# Altium PCB SiPM_ASSY.PCBDOC
Units mm, origin at the board's own origin, x right, y up, seen from the top; angles counter-clockwise.
Board outline 17.25 x 19.75 mm, 2 copper layers (TOP, BOT), stack 1.57 mm thick; 6 components, 5 nets, 25 pads, 10 vias.
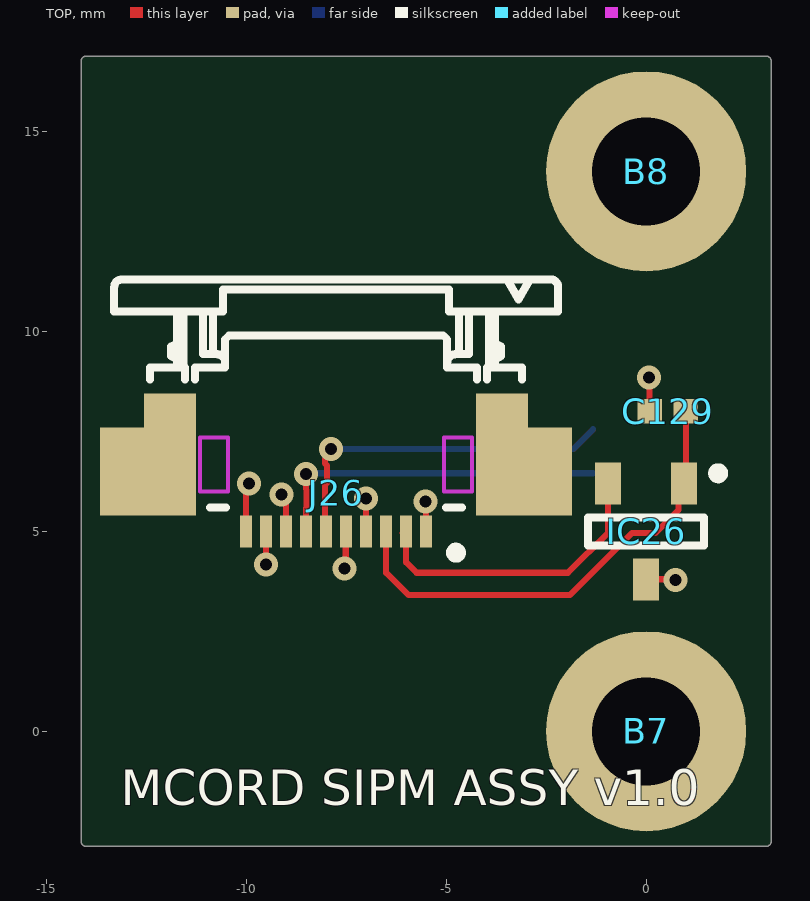
[diagram p0: TOP view]
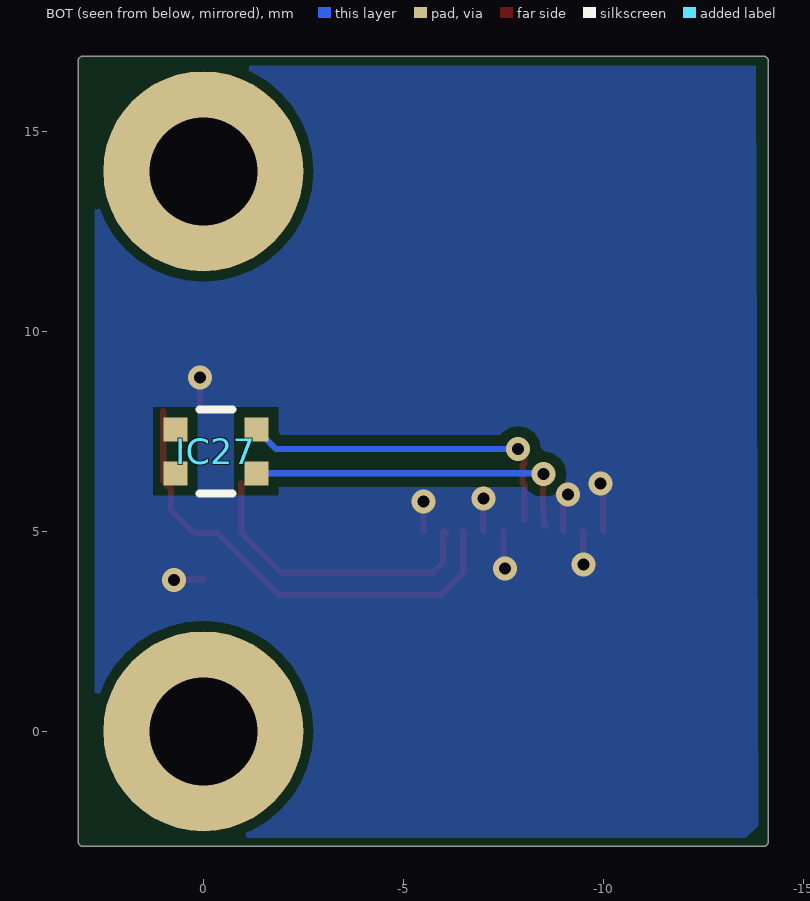
[diagram p1: BOT view, seen from below]
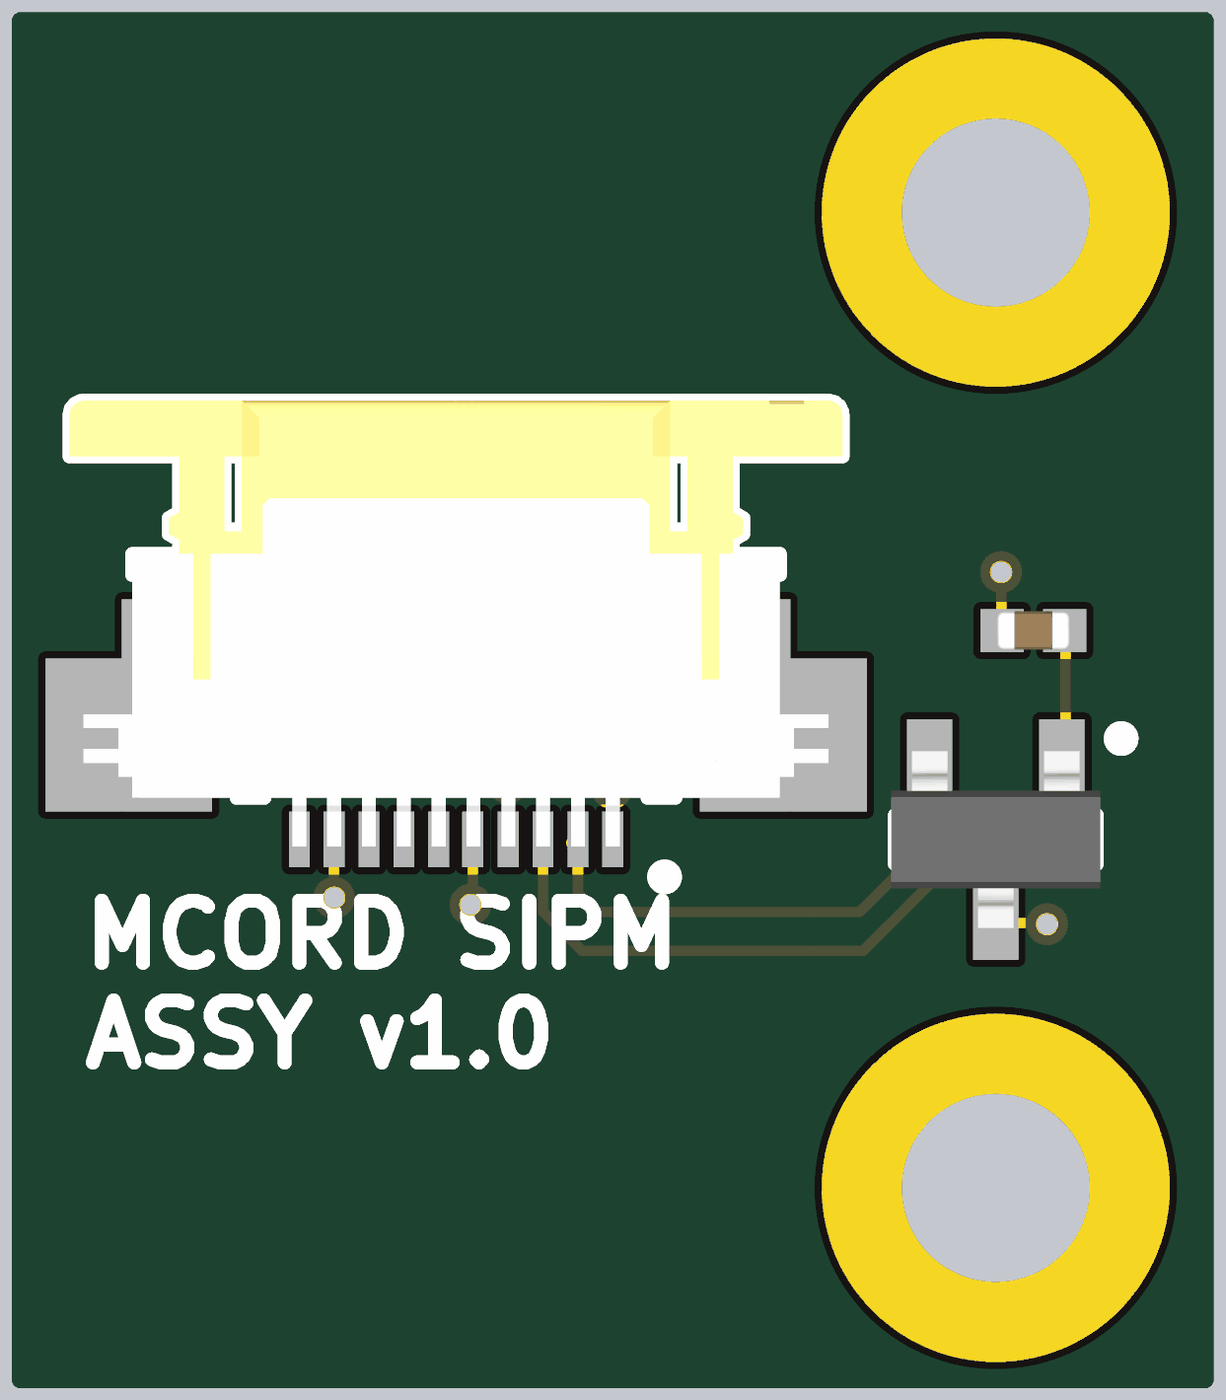
[diagram p2: 3D render of the assembled board from above, using the file's embedded part models]

## Layer stack, top to bottom
TopSolder: solder mask 0.01, Solder Resist, Dk 3.5
TOP: signal copper 0.035
Dielectric2: core 1.5, Core-042, Dk 4.6
BOT: signal copper 0.035
BottomSolder: solder mask 0.01, Solder Resist, Dk 3.5

## Board outline
-14,-2.877 cw(c-14,-2.75) -14.127,-2.75 -14.127,16.75 cw(c-14,16.75) -14,16.877 3,16.877 cw(c3,16.75) 3.127,16.75 3.127,-2.75 cw(c3,-2.75) 3,-2.877

## Design rules (kind name [scope] priority, off if disabled: settings)
AcuteAngle [All] p1: minimum=6.00000000000000E+0001 checktracksonly=FALSE
Clearance keepout [All vs OnLayer('KeepOutLayer')] p1: gap=0.1 ignorepadtopadclearanceinfootprint=FALSE
Clearance [All] p2: gap=0.152 ignorepadtopadclearanceinfootprint=FALSE except(0.254: Arc-Poly Track-Poly SMDPad-Poly THPad-Poly Via-Poly Fill-Poly Poly-Poly)
DiffPairsRouting [All] p1: maxlimit=0.508 minlimit=0.381 mostfreqgap=0.432 toplayer_minwidth=0.381 toplayer_maxwidth=0.381 toplayer_prefwidth=0.381 bottomlayer_minwidth=0.381 bottomlayer_maxwidth=0.381 bottomlayer_prefwidth=0.381 maxuncoupledlength=12.7
HoleSize [All] p1: absolutevalues=TRUE maxlimit=5.08 minlimit=0.025 maxpercent=80.000 minpercent=20.000
MinimumSolderMaskSliver [All] p1: minsoldermaskwidth=0
MinimumSolderMaskSliver SilkscreenOverComponentPads [All] p2: minsoldermaskwidth=0
PlaneClearance [All] p1: clearance=0.203
PlaneConnect PlaneConnect_pad [(InPadClass('All Pads'))] p1: planeconnectstyle=Relief reliefexpansion=0.508 reliefentries=4 reliefconductorwidth=0.254 reliefairgap=0.254
PlaneConnect [All] p2: planeconnectstyle=Direct reliefexpansion=0.508 reliefentries=4 reliefconductorwidth=0.254 reliefairgap=0.254
PolygonConnect PolygonConnect_pad [(InPadClass('All Pads'))] p1: connectstyle=Relief reliefconductorwidth=0.254 reliefentries=4 polygonreliefangle="90 Angle" airgapwidth=0.254
PolygonConnect [All] p2: connectstyle=Direct reliefconductorwidth=0.254 reliefentries=4 polygonreliefangle="90 Angle" airgapwidth=0.254
RoomDefinition SiPM_ASSY [InComponentClass('SiPM_ASSY')] p1: confinementstyle=ConfineIn formatcopy=TRUE lockcomponents=FALSE outline -9,3 -10,3 -10,-2 -9,-2
RoutingVias [All] p1: holewidth=0.2 width=0.5 viastyle="Through Hole" minholewidth=0.2 minwidth=0.5 maxholewidth=0.5 maxwidth=1
SilkToSilkClearance [All] p1: silktosilkclearance=0
SilkToSolderMaskClearance [IsPad] p1: minsilkscreentomaskgap=0 clearancetoexposedcopper=TRUE
SolderMaskExpansion [All] p1: expansion=0.102
ViasUnderSMD ViasUnderSMD_allow [InComponent('IC18') or InComponent('IC10') or InComponent('IC13') or InComponent('IC14') or InComponent('IC15')] p1: allowed=TRUE
ViasUnderSMD [All] p2: allowed=FALSE
Width Width_1 [(InDifferentialPairClass('All Differential Pairs'))] p1: maxlimit=0.203 minlimit=0.203 preferedwidth=0.203
Width [All] p2: maxlimit=2.54 minlimit=0.152 preferedwidth=0.152
23 further rules are at their usual default settings.

## Components (designator, comment, footprint, x,y, rotation, side; value= is the part's Value field where it differs from the comment)
B7 "Plated Hole" MTG270_500 0,0 r0 top
B8 "Plated Hole" MTG270_500 0,14 r0 top
C129 "100nF" CAPC1005X55N 0.54,8 r0 top
IC26 "LM45CIM3" SOT95P251X112-3N 0,5 r270 top
IC27 "S13360-1325PE" HAMAMATSU_S13360-1325PE -0.313,7 r90 bottom (schematic designator IC?)
J26 "FFC/FPC" MOLEX_52745-1097 -7.75,5 r180 top

## Footprints (in the part's own frame and the unit in brackets; to place one, negate y for a bottom-side part, rotate by r counter-clockwise, add the part's x,y. Pads: shape width x height; smd on the part's side, far side on the other; paste and mask are expansions set on the pad)
CAPC1005X55N [mm] "Capacitor, Non-Polarized, Chip; 1.00mm L X 0.50mm W X 0.70mm H, IPC Medium Density"
  rect 0.62x0.62 smd: 1(-0.45,0) 2(0.45,0)
  body extent -0.52,-0.27 0.53,0.28, height 0.55
HAMAMATSU_S13360-1325PE [mm] "1.3 x 1.3mm2, 50µm Microcell Type, SMD MPPC (Multi-Pixel Photon Counter, Body 2.1mm x mm X 2.625mm"
  rect 0.6x0.6 smd: 1(-0.55,1.012) 2(-0.55,-1.012) 3(0.55,-1.012) 4(0.55,1.012)
  silkscreen extent -1.05,-0.41 1.05,0.41, body extent -1.05,-1.31 1.05,1.31, height 1
MOLEX_52745-1097 [mm] "10 Contacts, 0.5mm Pitch, Right Angled Surface Mount FPC Connector, ZIF, Top Contact Style"
  rect 0.3x0.8 smd: 1(-2.25,0) 2(-1.75,0) 3(-1.25,0) 4(-0.75,0) 5(-0.24,0) 6(0.25,0) 7(0.75,0) 8(1.25,0) 9(1.75,0) 10(2.25,0)
  rect 1.1x2.2 smd: MECH(-5.35,-1.5) MECH(5.35,-1.5)
  rect 1.3x3.05 smd: MECH(-4.15,-1.925) MECH(4.15,-1.925)
  TOP keep-out lines w0.1: 3.4,-1 2.7,-1 2.7,-2.34 3.4,-2.34 3.4,-1 ; -2.7,-1 -2.7,-2.34 -3.4,-2.34 -3.4,-1 -2.7,-1
  silkscreen extent -5.55,-6.3 5.55,0.66, body extent -5.55,-6.3 5.55,0.1, height 2
MTG270_500 [mm] "Plated Through Hole: Hole Dia.=2.7mm Pad Dia.=5.0mm"
  round 5 hole 2.7: 1(0,0)
SOT95P251X112-3N [mm] "SOT23 3-Leads, Pitch 0.95mm - Body 1.3x2.9mm, IPC Medium Density"
  rect 1.05x0.65 smd: 1(-1.2,0.95) 2(-1.2,-0.95) 3(1.2,0)
  silkscreen extent -1.57,-1.45 0.35,1.92, body extent -1.27,-1.5 1.27,1.5, height 1.12

## Part data
B7 B8: library part PLATED_HOLE2.7_PAD5.0, "Single Terminal Socket", Author="CERN DEM JMW", ComponentHeight=0mm, Component Type="Standard (No BOM)", CreateDate=27.09.2011, Family="Plated Hole", HelpURL=Undefined, LatestRevisionDate=27.09.2011, Mounted=No, PackageDescription="Plated Through Hole: Hole Dia.=2.7mm Pad Dia.=5.0mm", Part Description="Plated Through Hole: Hole Dia.=2.7mm Pad Dia.=5.0mm", Part Number=PLATED_HOLE2.7_PAD5.0, Pin Count=1, Sense=No, SMD=No, Socket=No, Status=None
C129: library part CC0402_100NF_16V_10%_X7R, "Non-polarised capacitor", Case=0402, Manufacturer=GENERIC, Manufacturer1 ComponentHeight=0.55mm, Manufacturer1 Example=MURATA, Manufacturer1 Part Number=GRM155R71C104KA88D, Tolerance=±10%, Voltage=16V, Author="CERN DEM JLC", Component Type=Standard, CreateDate=05.12.2013, HelpURL=\\cern.ch\dfs\Applications\Altium\Datasheets\CC0402_X7R_MURATA_GRM.pdf, LatestRevisionDate=03.12.2007, Manufacturer Part Number=CC0402_100NF_16V_10%_X7R, Mounted=Yes, Part Description="SMD Multilayer Chip Ceramic Capacitor", Part Number=CC0402_100NF_16V_10%_X7R, Pin Count=2, Sense=No, SMD=Yes, Socket=No, Status="Not Recommended", TC=X7R
IC26: "-20° to +100°C ±3°C Precision Centigrade Temperature Sensors", Case=SOT23, Manufacturer="NATIONAL SEMICONDUCTOR", Author="CERN DEM JLC", Bonding=No, ComponentHeight=1.12mm, Component Type=Standard, CreateDate=02.12.2009, Device=LM45CIM3, HelpURL=\\cern.ch\dfs\Applications\Altium\Datasheets\LM45CIM3.pdf, LatestRevisionDate=02.12.2009, Manufacturer Part Number=LM45CIM3, Mounted=Yes, PackageDescription="SOT23 3-Leads, Pitch 0.95mm - Body 1.3x2.9mm, IPC Medium Density", Part Description="-20° to +100°C ±3°C Precision Centigrade Temperature Sensors", Part Number=LM45CIM3, Pin Count=3, PressFit=No, Sense=No, SMD=Yes, Socket=No, Status=Obsolete
IC27: "MPPC (Multi-Pixel Photon Counter)", Manufacturer=HAMAMATSU, Author=GK, Bonding=No, ComponentHeight=1mm, Component Type=Standard, CreateDate=01.04.2015, Device=S13360-1325PE, HelpURL=\\cern.ch\dfs\Applications\Altium\Datasheets\S13081-050PE.pdf, LatestRevisionDate=01.04.2015, Manufacturer Part Number=S13360-1325PE, Mounted=Yes, PackageDescription="1.3 x 1.3mm2, 25µm Pixel Pitch, SMD MPPC (Multi-Pixel Photon Counter, Body 2.1mm x mm x 2.625mm x 1mm", Part Description="1.3 x 1.3mm2, 25µm Pixel Pitch, SMD MPPC (Multi-Pixel Photon Counter)", Part Number=S13360-1325PE, Pin Count=4, PressFit=No, Sense=No, SMD=Yes, Socket=No
J26: library part MOLEX_52745-1097, "Connector 10 Female", Manufacturer=MOLEX, Manufacturer Part Number=52745-1097, Author="CERN DEM JLC", ComponentHeight=2mm, Component Type=Standard, CreateDate=04.11.2014, Family=FFC/FPC, HelpURL=\\cern.ch\dfs\Applications\Altium\Datasheets\MOLEX_52745-1097.pdf, LatestRevisionDate=05.12.2014, Mounted=Yes, Part Description="10 Contacts, 0.5mm Pitch, Right Angled Surface Mount FFC/FPC Connector, ZIF, Top Contact Style", Part Number=MOLEX_52745-1097, Pin Count=10, PressFit=No, Sense=No, SMD=Yes, Socket=No, Status=None

## Via types
v1: diameter 0.6, hole 0.3, TOP to BOT, tented both sides, 10 vias

## Nets (pads, with @x,y where several pads share a name; then routed paths per layer and width w, separated by ;. In a path a pad name is that pad's centre, name@x,y a point inside that pad or via, vN(x,y) a via of type N, cw(c..) or ccw(c..) an arc to the next point about the centre after c; other vN are vias at no path point)
GND: C129.1 IC26.3 J26.1 J26.4 J26.5 J26.8 J26.9 J26.10 | length 7.1
  TOP w0.152: J26.10 -10,6.129 v1(-9.931,6.198) ; v1@-9.5,4.166 J26.9 ; v1(-9.119,5.918) -9,5.8 J26.8 ; v1(-7.544,4.064) -7.51,4.098 J26.5 ; v1(-7.01,5.817) -7,5.806 J26.4 ; v1(-5.512,5.74) -5.506,5.734 -5.506,5.006 J26.1 ; IC26.3 0.721,3.8 v1(0.737,3.785) ; v1(0.076,8.839) 0.08,8.835 C129.1@0.08,8
  other v1: -9.5,4.166
NetC129_2: C129.2 IC26.1 J26.3 | length 12
  TOP w0.152: J26.3 -6.5,3.962 -5.941,3.404 -1.905,3.404 -0.356,4.953 0.229,4.953 0.811,5.536 0.811,6.061 IC26.1 1,6.25 C129.2@1,8
NetIC26_2: IC26.2 J26.2 | length 7.7
  TOP w0.152: J26.2@-6.096,4.953 J26.2@-6,4.857 ; J26.2 J26.2@-6,4.857 ; IC26.2 -0.95,4.968 -1.956,3.962 -5.74,3.962 -6,4.222 J26.2@-6,4.857
SIPM_A: IC27.3 J26.6 | length 8.6
  TOP w0.152: J26.6@-8.026,5.283 -8.026,6.161 -7.98,6.207 -7.98,6.645 -8.026,6.691 -8.026,6.815 -7.874,6.967 v1(-7.874,7.061)
  BOT w0.152: v1(-7.874,7.061) -1.815,7.061 IC27.3
SIPM_C: IC27.2 J26.7 | length 8.5
  TOP w0.152: J26.7@-8.56,5.131 -8.509,5.182 -8.509,5.577 -8.488,5.598 -8.488,6.036 -8.509,6.056 v1(-8.509,6.426)
  BOT w0.152: v1(-8.509,6.426) -8.485,6.45 IC27.2
pads on no net: B7.1 B8.1 IC27.1 IC27.4 J26.MECH

## Polygon pours and split planes (outlines as drawn)
GND on BOT "NONET_L-01_P-001" (solid, remove dead copper, pour order 0): -13.818,16.637 2.692,16.637 2.718,16.612 2.718,-2.565 2.616,-2.667 -13.564,-2.667 -13.868,-2.362

## Silkscreen, mask and mechanical layers (free items; w line width, h text height)
TopOverlay:
  text "MCORD SIPM ASSY v1.0" at -13.132,-1.854 h0.89
Mechanical1:
  lines w0.254: -2.33,16.75 3,16.75 3,-2.75 -14,-2.75 -14,16.75 -2.25,16.75
Mechanical14:
  lines w0.01: -0.701,7.65 -0.701,7.65
  lines w0.1: -0.701,6.35 0.599,7.65 ; -0.04,0 -0.04,14.21 ; 0.599,6.35 -0.701,7.65 ; -0.701,7.65 -0.701,7.65 ; 0.599,7.65 0.599,7.65